# EAGLE board CAM_BOARD_V1_X (EAGLE 9.6.2)

Size 100 x 80 mm. Coordinates in mm from the lower left corner, seen from the top.
Outline: 0,0 100,0 100,80 0,80 0,0
Copper layers (1*16): Top 0.035mm / dielectric 1.5mm / Bottom 0.035mm
Design rules "default": minimum track width 6mil, minimum drill 0.35mm, track to track 6mil, track to pad 6mil, pad to pad 6mil, via to via 6mil, smd to smd 6mil, copper to edge 40mil, drill to drill 6mil, minimum pad ring 10mil, minimum via ring 8mil, stop-mask expansion 4mil, vias tented up to drill 0mil, thermal gap 10mil

## Footprints (pad centres in the part's own frame; a part is rotated, then mirrored left to right if it is on the bottom)
BATTCON_20MM_4LEGS_OVERPASTE_INNER = smd 1.778 x 2.54: 1 -11,1.55; 3 11,1.55; P$1 -11,-1.55; P$2 11,-1.55 | smd 13 x 8: 2 0,0
0603 = smd 1.1 x 1: 1 -0.85,0; 2 0.85,0
0603-CAP = smd 1.1 x 1: 1 -0.85,0; 2 0.85,0
SOD-323 = smd 0.63 x 0.83: A 1.15,0; C -1.15,0
WSOF-6 = smd 0.55 x 0.25: 1 -1.375,0.5; 2 -1.375,0; 3 -1.375,-0.5; 4 1.375,-0.5; 5 1.375,0; 6 1.375,0.5
1X06-SMD_RA_MALE = smd 1 x 3: 1 -6.35,5; 2 -3.81,5; 3 -1.27,5; 4 1.27,5; 5 3.81,5; 6 6.35,5 | hole 1.4: -5.08,0; 5.08,0
1X12_SMD_COMBINED = smd 1 x 2: 1 0,1.65; 1@2 0,-1.65; 2 2.54,-1.65; 2@2 2.54,1.65; 3 5.08,1.65; 3@2 5.08,-1.65; 4 7.62,-1.65; 4@2 7.62,1.65; 5 10.16,1.65; 5@2 10.16,-1.65; 6 12.7,-1.65; 6@2 12.7,1.65; 7 15.24,1.65; 7@2 15.24,-1.65; 8 17.78,-1.65; 8@2 17.78,1.65; 9 20.32,1.65; 9@2 20.32,-1.65; 10 22.86,-1.65; 10@2 22.86,1.65; 11 25.4,1.65; 11@2 25.4,-1.65; 12 27.94,-1.65; 12@2 27.94,1.65
1X08_SMD_COMBINED = smd 1 x 2: 1 0,1.65; 1@2 0,-1.65; 2 2.54,-1.65; 2@2 2.54,1.65; 3 5.08,1.65; 3@2 5.08,-1.65; 4 7.62,-1.65; 4@2 7.62,1.65; 5 10.16,1.65; 5@2 10.16,-1.65; 6 12.7,-1.65; 6@2 12.7,1.65; 7 15.24,1.65; 7@2 15.24,-1.65; 8 17.78,-1.65; 8@2 17.78,1.65
2X5-PTH-1.27MM = drill 0.508 pad 1: 1 -2.54,-0.635; 2 -2.54,0.635; 3 -1.27,-0.635; 4 -1.27,0.635; 5 0,-0.635; 6 0,0.635; 7 1.27,-0.635; 8 1.27,0.635; 9 2.54,-0.635; 10 2.54,0.635
JST04_1MM_RA = smd 0.6 x 1.35: 1 -1.5,0; 2 -0.5,0; 3 0.5,0; 4 1.5,0 | smd 1.2 x 2: NC1 2.8,-3.675; NC2 -2.8,-3.675
FPC-24-AMPHENOL-SFV24R-1STE1HLF = smd 0.3 x 1.4: 1 5.75,2.4; 2 5.25,2.4; 3 4.75,2.4; 4 4.25,2.4; 5 3.75,2.4; 6 3.25,2.4; 7 2.75,2.4; 8 2.25,2.4; 9 1.75,2.4; 10 1.25,2.4; 11 0.75,2.4; 12 0.25,2.4; 13 -0.25,2.4; 14 -0.75,2.4; 15 -1.25,2.4; 16 -1.75,2.4; 17 -2.25,2.4; 18 -2.75,2.4; 19 -3.25,2.4; 20 -3.75,2.4; 21 -4.25,2.4; 22 -4.75,2.4; 23 -5.25,2.4; 24 -5.75,2.4 | smd 1.4 x 1.6: MNT1@0 -8.15,1.5; MNT2@1 8.15,1.5 | smd 1.25 x 2.3: MNT1@1 -6.825,1.15; MNT2@0 6.825,1.15
COMBO-JUMPER_2_NC_TRACE = smd 0.635 x 1.27: 1 -0.508,0; 2 0.508,0 | drill 1.016 pad 1.88: 3 -1.27,0; 4 1.27,0
0603@1 = smd 1.1 x 1: 1 -0.85,0; 2 0.85,0
TACTILE_SWITCH_SMD_4.6X2.8MM = smd 0.9 x 1: 1 -2.05,-0.8; 2 2.05,-0.8; 3 2.05,0.8; 4 -2.05,0.8
PAD.03X.05 = smd 1.27 x 1.27: P$1 0,0
ARTEMIS_FP = smd 0.4 x 0.6: AD16 -4,-3.7; BOOT 1.5,4.5; D0 0.5,-4.5; D1 -0.5,-4.5; D2 -1,-3.7; D3 2,-3.7; D7 -1.5,4.5; D8 -0.5,4.5; D9 2,3.7; D10 1,3.7; D14 -5,3.7; D17 -3.5,-4.5; D36 2.5,-4.5; D38 3,-3.7; D40 2.5,4.5; D41 -2.5,-4.5; GND@1 4.5,4.5; GND@39 -5.5,-4.5; GND@47 -1.5,-4.5; GND@59 4.5,-4.5; RXI-0 3.5,4.5; SWDCK 4,3.7; SWDIO 0,3.7; TXO-0 0.5,4.5; ~AD31 -3,-3.7; ~AD35 -2,3.7; ~D4 -2.5,4.5; ~D5 -1,3.7; ~D18 -4.5,-4.5; ~D19 -5,-3.7; ~D22 -3.5,4.5; ~D23 -4,3.7; ~D24 -3,3.7; ~D27 -4.5,4.5; ~D28 -5.5,4.5; ~D37 3.5,-4.5; ~D39 3,3.7; ~D42 1.5,-4.5; ~D43 1,-3.7; ~D44 4,-3.7; ~D45 -2,-3.7; ~RST 0,-3.7 | smd 0.6 x 0.4: AD34 -6.5,-0.5; D15 -6.5,0.5; VDD@36 -5.7,-3; VDD@37 -6.5,-3.5; XI -6.5,-2.5; XO -5.7,-2; ~AD11 -5.7,-1; ~AD12 -5.7,2; ~AD13 -5.7,1; ~AD29 -6.5,-1.5; ~AD32 -5.7,3; ~AD33/SWO -5.7,0; ~D6 -6.5,3.5; ~D25 -6.5,2.5; ~D26 -6.5,1.5 | smd 0.6 x 0.6: GND@22 -6.5,4.5; GND@38 -6.5,-4.5
BME280_LGA = smd 0.5 x 0.35: P$1 1.025,0.975; P$2 1.025,0.325; P$3 1.025,-0.325; P$4 1.025,-0.975; P$5 -1.025,-0.975; P$6 -1.025,-0.325; P$7 -1.025,0.325; P$8 -1.025,0.975
SOT23-5 = smd 0.55 x 1.2: 1 -0.95,-1.3; 2 0,-1.3; 3 0.95,-1.3; 4 0.95,1.3; 5 -0.95,1.3
CRYSTAL-SMD-3.2X1.5MM = smd 1 x 1.8: P$1 -1.25,0; P$2 1.25,0

## Placement (x,y rotation side)
BT1  [BATTCON_20MM_4LEGS_OVERPASTE_INNER]  -25.4,10.16 0 top  (outside the outline)
C1  0.1uF  [0603]  -52.07,-2.54 0 top  (outside the outline)
C2  0.1uF  [0603]  -58.42,-7.62 0 top  (outside the outline)
C5  0.1uF  [0603-CAP]  -26.67,60.96 0 top  (outside the outline)
C6  0.1uF  [0603-CAP]  -30.48,60.96 0 top  (outside the outline)
C7  0.1uF  [0603-CAP]  -34.29,60.96 0 top  (outside the outline)
C10  15pF  [0603]  -46.99,55.88 0 top  (outside the outline)
C11  15pF  [0603]  -50.8,55.88 0 top  (outside the outline)
C17  1nF  [0603]  -54.61,-7.62 0 top  (outside the outline)
C18  1.0uF  [0603]  -54.61,55.88 0 top  (outside the outline)
C19  1.0uF  [0603]  -58.42,55.88 0 top  (outside the outline)
D1  1A/23V/620mV  [SOD-323]  -34.29,55.88 0 top  (outside the outline)
D2  1A/23V/620mV  [SOD-323]  -41.91,55.88 0 top  (outside the outline)
IC1  BH1750  [WSOF-6]  -57.15,50.8 0 top  (outside the outline)
J1  [1X06-SMD_RA_MALE]  -45.72,7.62 0 top  (outside the outline)
J2  [1X12_SMD_COMBINED]  -43.18,35.56 0 top  (outside the outline)
J4  SMD  [1X08_SMD_COMBINED]  -49.53,25.4 0 top  (outside the outline)
J5  CORTEX_DEBUG  [2X5-PTH-1.27MM]  -36.83,50.8 0 top  (outside the outline)
J6  QWIIC_RIGHT_ANGLE  [JST04_1MM_RA]  -48.26,52.07 0 top  (outside the outline)
J7  CAMERA-HIMAXBOTTOM-CONTACT  [FPC-24-AMPHENOL-SFV24R-1STE1HLF]  -22.86,50.8 0 top  (outside the outline)
J9  [1X12_SMD_COMBINED]  -43.18,43.18 0 top  (outside the outline)
JP1  JUMPER-COMBO_2_NC_TRACE  [COMBO-JUMPER_2_NC_TRACE]  -19.05,57.15 0 top  (outside the outline)
R1  100k  [0603]  -50.8,-7.62 0 top  (outside the outline)
R3  1k  [0603@1]  -15.24,60.96 0 top  (outside the outline)
R9  1k  [0603@1]  -19.05,60.96 0 top  (outside the outline)
R13  10k  [0603@1]  -22.86,60.96 0 top  (outside the outline)
R27  100k  [0603]  -58.42,-11.43 0 top  (outside the outline)
R28  220k  [0603]  -54.61,-11.43 0 top  (outside the outline)
S3  RESET  [TACTILE_SWITCH_SMD_4.6X2.8MM]  -57.15,-2.54 0 top  (outside the outline)
TP1  [PAD.03X.05]  -36.83,60.96 0 top  (outside the outline)
TP2  [PAD.03X.05]  -39.37,60.96 0 top  (outside the outline)
TP5  TEST-POINT3X5  [PAD.03X.05]  -41.91,60.96 0 top  (outside the outline)
TP6  TEST-POINT3X5  [PAD.03X.05]  -44.45,60.96 0 top  (outside the outline)
U2  ARTEMIS_MODULESMD  [ARTEMIS_FP]  -21.59,26.67 0 top  (outside the outline)
U3  BME280  [BME280_LGA]  -54.61,24.13 0 top  (outside the outline)
U4  AP2127K-1.8V  [SOT23-5]  -49.53,43.18 0 top  (outside the outline)
Y1  32.768kHz  [CRYSTAL-SMD-3.2X1.5MM]  -27.94,55.88 0 top  (outside the outline)

## Library data of the parts
BT1 = SparkFun-Batteries
C1 C5-C7 = SparkFun-Capacitors; PROD_ID: CAP-08604
C2 = SparkFun-Capacitors; PROD_ID: CAP-00810
C10 C11 = SparkFun-Capacitors; PROD_ID: CAP-07881
C17 = SparkFun-Capacitors; PROD_ID: CAP-07886
C18 C19 = SparkFun-Capacitors; PROD_ID: CAP-00868
D1 D2 = SparkFun-DiscreteSemi; PROD_ID: DIO-11623
IC1 = microbuilder
J1 = SparkFun-Connectors; PROD_ID: CONN-08971
J2 J9 = SparkFun-Connectors; PROD_ID: CONN-15197
J4 = SparkFun-Connectors; PROD_ID: CONN-10204; SF_ID: PRT-11543
J5 TP1 TP2 TP5 TP6 = SparkFun-Connectors
J6 = SparkFun-Connectors; PROD_ID: CONN-13694
J7 = SparkFun-Connectors; DIGIKEY: 609-4320-2-ND; PROD_ID: CONN-14233
JP1 = SparkFun-Jumpers
R1 R27 = SparkFun-Resistors; PROD_ID: RES-07828
R3 R9 = SparkFun-Resistors; PROD_ID: RES-07856
R13 = SparkFun-Resistors; PROD_ID: RES-00824
R28 = SparkFun-Resistors; PROD_ID: RES-08969
S3 = SparkFun-Switches; PROD_ID: SWCH-13065
U2 = SparkFun-IC-Microcontroller; PROD_ID: SUB-14479
U3 = BME280ComponentLibrary; PROD_ID: IC-13090
U4 = SparkFun-IC-Power; PROD_ID: VREG-14239
Y1 = SparkFun-Clocks; PROD_ID: XTAL-13062

## Nets
1.8V: C19.1 J4.7 J4.7@2 J4.8 J4.8@2 J7.10 U4.5
3.3V: J4.5 J4.5@2 J4.6 J4.6@2 J6.2
!DTR: C1.1 C2.1 J1.1 R1.2
!TGT_RST: J5.10 U2.~RST
AMBIQ_!RST: C1.2 C17.1 R27.1 S3.3 S3.4
BOOT: C2.2 R28.2
CAMERA_D0: J7.14 U2.D0
CAMERA_D1: J7.3 U2.D1
CAMERA_D2: J7.9 U2.D2
CAMERA_D3: J7.5 U2.D3
CAMERA_D4: J7.12 U2.~D4
CAMERA_D5: J7.20 U2.~D5
CAMERA_D6: J7.19 U2.~D6
CAMERA_D7: J7.13 U2.D7
CAMERA_HSYNC: J7.16 U2.D17
CAMERA_INT: J7.18 U2.D10
CAMERA_MCLK: J7.8 U2.~D18
CAMERA_PCLK: J7.17 U2.~D19
CAMERA_TRIG: J7.7 U2.D14
CAMERA_VSYNC: J7.6 U2.D15
D13: J9.5 J9.5@2 U2.~AD13
D16: J2.12 J2.12@2 U2.AD16
D23: J9.3 J9.3@2
D23_LED: U2.~D23
D24: J9.1 J9.1@2 U2.~D24
D25: J9.11 J9.11@2
D26: J9.10 J9.10@2 U2.~D26
D27: J9.4 J9.4@2
D28: J9.12 J9.12@2 U2.~D28
D29: J9.8 J9.8@2 U2.~AD29
D31: J2.11 J2.11@2 U2.~AD31
D32: J9.7 J9.7@2 U2.~AD32
D33: J9.6 J9.6@2 U2.~AD33/SWO
D34: J9.9 J9.9@2 U2.AD34
D35: J9.2 J9.2@2 U2.~AD35
D36: J2.6 J2.6@2 U2.D36
D37: J2.4 J2.4@2 U2.~D37
D38: J2.5 J2.5@2 U2.D38
D39: J2.1 J2.1@2 U2.~D39
D40: J2.2 J2.2@2 U2.D40
D41: J2.10 J2.10@2 U2.D41
D42: J2.7 J2.7@2 U2.~D42
D43: J2.8 J2.8@2 U2.~D43
D44: J2.3 J2.3@2 U2.~D44
D45: J2.9 J2.9@2 U2.~D45
FTDI_VCC: D2.A J1.4
GND: BT1.2 C5.2 C6.2 C7.2 C10.1 C11.1 C17.2 C18.2 C19.2 IC1.3 J1.6 J4.1 J4.1@2 J4.2 J4.2@2 J5.3 J5.5 J5.9 J6.1 J7.2 J7.15 R1.1 R3.1 R13.1 R28.1 S3.1 S3.2 U2.GND@1 U2.GND@22 U2.GND@38 U2.GND@39 U2.GND@47 U2.GND@59 U3.P$1 U3.P$5 U3.P$7 U4.2
N$2: C7.1 IC1.5 R9.1
N$14: C10.2 U2.XI Y1.P$2
N$15: C11.2 U2.XO Y1.P$1
PDM_CLK: U2.~AD12
PDM_DATA: U2.~AD11
SCL: J6.4 J7.21 U2.D8
SCL2: IC1.6 U2.~D27 U3.P$4
SDA: J6.3 J7.22 U2.D9
SDA2: IC1.4 U2.~D25 U3.P$3
TGT_BOOT: R13.2 U2.BOOT
TGT_SWCLK: J5.4 TP1.P$1 U2.SWDCK
TGT_SWDIO: J5.2 TP2.P$1 U2.SWDIO
TGT_SWO: J5.6 U2.~D22
UART-RX: J1.3 TP6.P$1 U2.RXI-0
UART-TX: J1.2 TP5.P$1 U2.TXO-0
V_BATT: BT1.1 D1.A
V_USB: J4.3 J4.3@2 J4.4 J4.4@2
VDD: C5.1 C6.1 C18.1 IC1.1 IC1.2 J5.1 J7.4 J7.11 JP1.2 JP1.4 R3.2 R9.2 R27.2 U2.VDD@36 U2.VDD@37 U3.P$2 U3.P$6 U3.P$8 U4.1 U4.3
VIN1: D1.C D2.C JP1.1 JP1.3

## Tracks (layer width: path | path; a pad name or v marks a point on that pad's centre or on a via)
1.8V  (6 unrouted)
3.3V  (4 unrouted)
!DTR  (3 unrouted)
!TGT_RST  (1 unrouted)
AMBIQ_!RST  (4 unrouted)
BOOT  (1 unrouted)
CAMERA_D0  (1 unrouted)
CAMERA_D1  (1 unrouted)
CAMERA_D2  (1 unrouted)
CAMERA_D3  (1 unrouted)
CAMERA_D4  (1 unrouted)
CAMERA_D5  (1 unrouted)
CAMERA_D6  (1 unrouted)
CAMERA_D7  (1 unrouted)
CAMERA_HSYNC  (1 unrouted)
CAMERA_INT  (1 unrouted)
CAMERA_MCLK  (1 unrouted)
CAMERA_PCLK  (1 unrouted)
CAMERA_TRIG  (1 unrouted)
CAMERA_VSYNC  (1 unrouted)
D13  (2 unrouted)
D16  (2 unrouted)
D23  (1 unrouted)
D24  (2 unrouted)
D25  (1 unrouted)
D26  (2 unrouted)
D27  (1 unrouted)
D28  (2 unrouted)
D29  (2 unrouted)
D31  (2 unrouted)
D32  (2 unrouted)
D33  (2 unrouted)
D34  (2 unrouted)
D35  (2 unrouted)
D36  (2 unrouted)
D37  (2 unrouted)
D38  (2 unrouted)
D39  (2 unrouted)
D40  (2 unrouted)
D41  (2 unrouted)
D42  (2 unrouted)
D43  (2 unrouted)
D44  (2 unrouted)
D45  (2 unrouted)
FTDI_VCC  (1 unrouted)
GND  (36 unrouted)
N$2  (2 unrouted)
N$14  (2 unrouted)
N$15  (2 unrouted)
SCL  (2 unrouted)
SCL2  (2 unrouted)
SDA  (2 unrouted)
SDA2  (2 unrouted)
TGT_BOOT  (1 unrouted)
TGT_SWCLK  (2 unrouted)
TGT_SWDIO  (2 unrouted)
TGT_SWO  (1 unrouted)
UART-RX  (2 unrouted)
UART-TX  (2 unrouted)
V_BATT  (1 unrouted)
V_USB  (3 unrouted)
VDD  (19 unrouted)
VIN1  (3 unrouted)